# EAGLE board M215X (EAGLE 6.6.0)
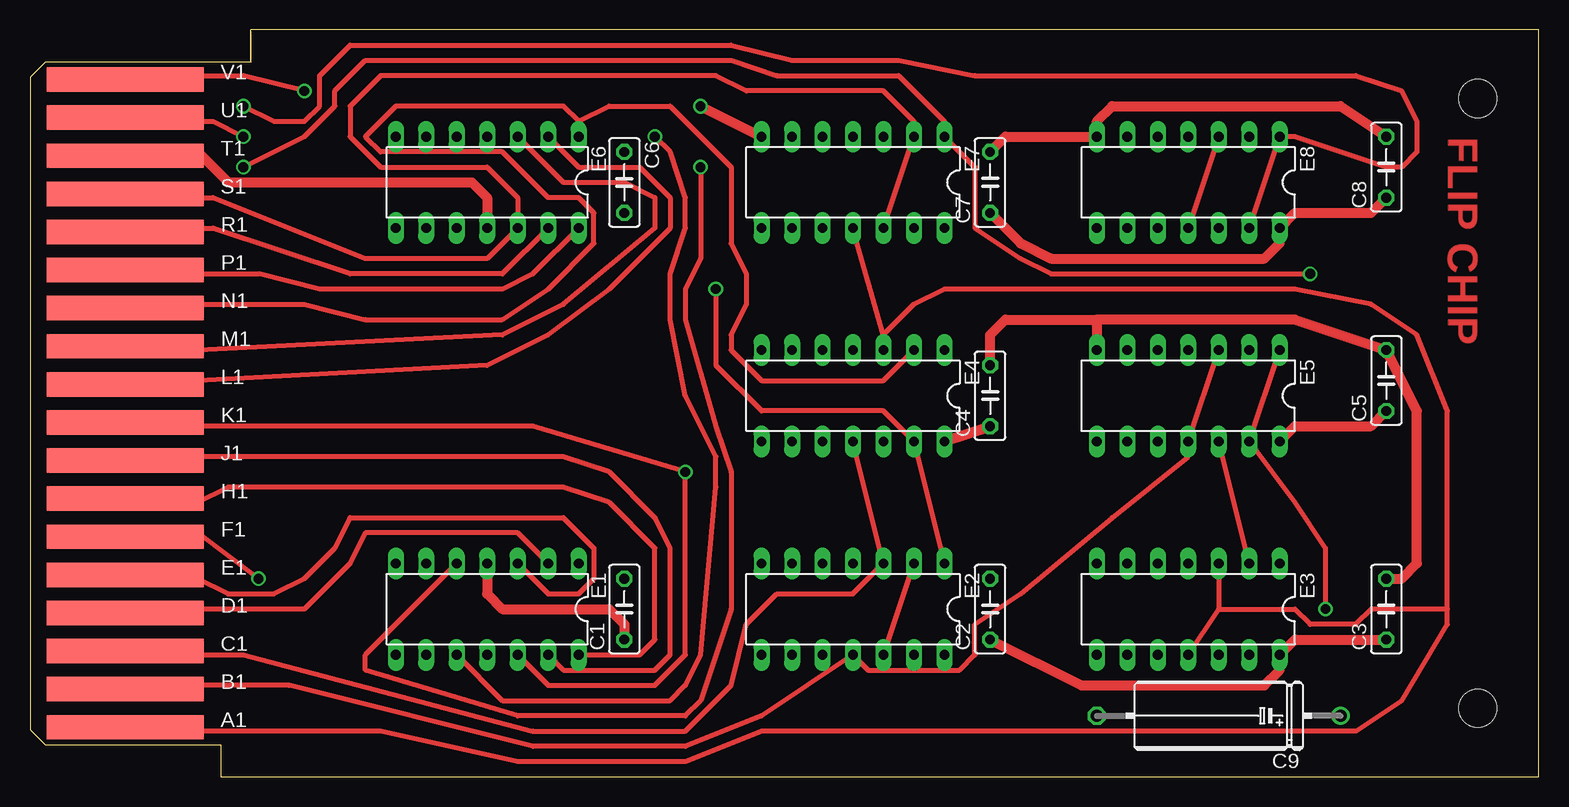
[diagram p0: board, top side]
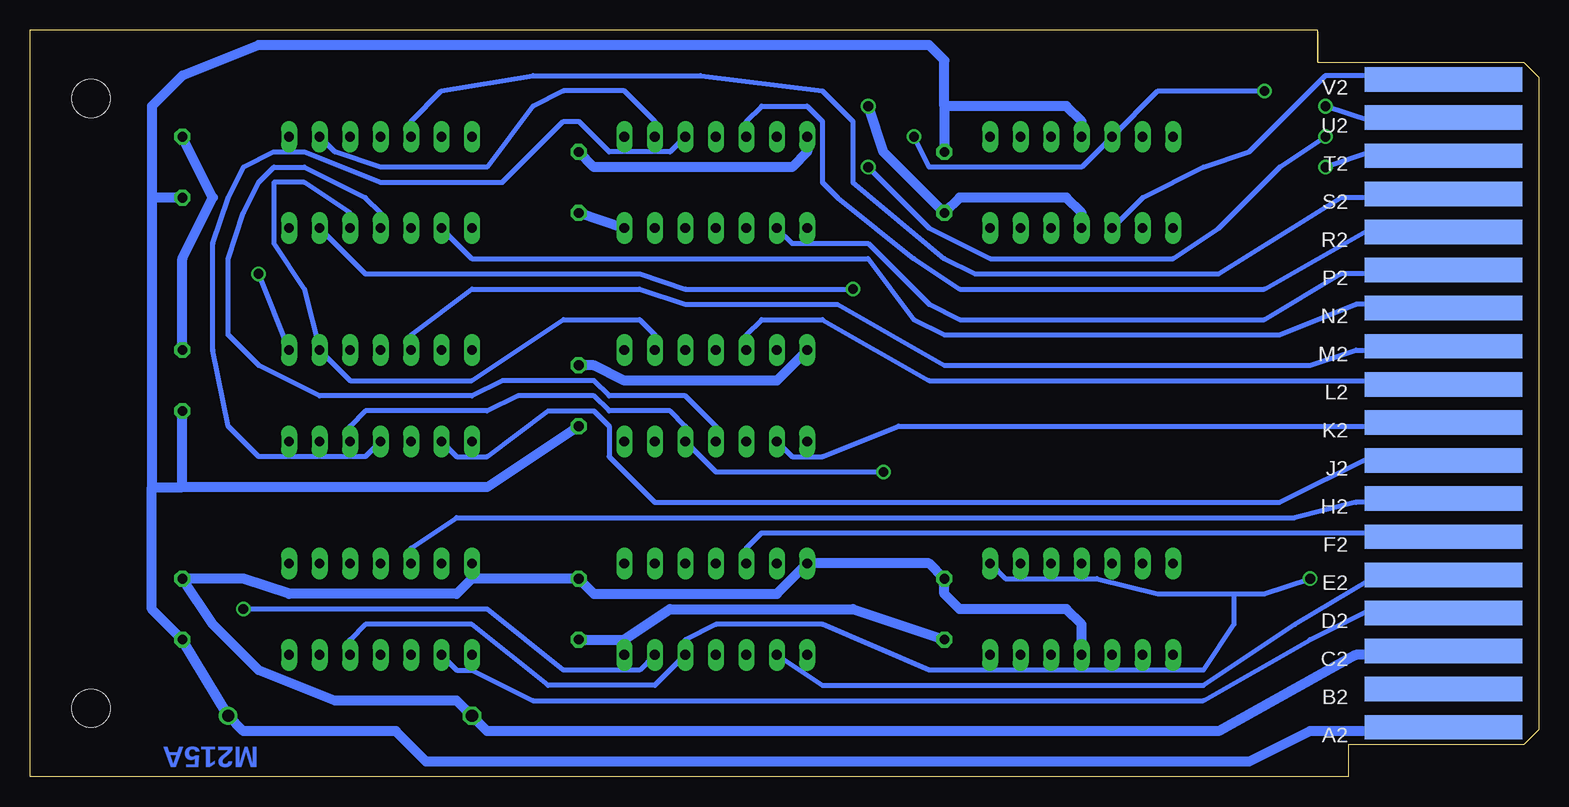
[diagram p1: board, bottom side, seen from below]

Size 125.73 x 62.23 mm. Coordinates in mm from the lower left corner, seen from the top.
Copper layers (1+16): Top 0.035mm / dielectric 1.5mm / Bottom 0.035mm
Design rules "16mils": minimum track width 16mil, minimum drill 32mil, track to track 15mil, track to pad 10mil, pad to pad 10mil, via to via 10mil, smd to smd 10mil, copper to edge 13mil, drill to drill 10mil, minimum pad ring 10mil, minimum via ring 8mil, stop-mask expansion 0mil, vias tented up to drill 0mil, thermal gap 10mil
Net classes: 1 supply: width 0.813 mm

## Footprints (pad centres in the part's own frame; a part is rotated, then mirrored left to right if it is on the bottom)
C050-025X075 = drill 0.813 octagon: 1 -2.54,0; 2 2.54,0
E12-8 = drill 1.016: + -10.16,0 | drill 1.016 octagon: - 10.16,0
DIL14 = drill 0.813 long: 1 -7.62,-3.81; 2 -5.08,-3.81; 3 -2.54,-3.81; 4 0,-3.81; 5 2.54,-3.81; 6 5.08,-3.81; 7 7.62,-3.81; 8 7.62,3.81; 9 5.08,3.81; 10 2.54,3.81; 11 0,3.81; 12 -2.54,3.81; 13 -5.08,3.81; 14 -7.62,3.81
SINGLE = hole 3.175: 120.65,56.515; 120.65,5.715
EDGE-CON2 = smd 13.106 x 2.032: A1 7.938,4.128; B1 7.938,7.303; C1 7.938,10.477; D1 7.938,13.652; E1 7.938,16.828; F1 7.938,20.003; H1 7.938,23.177; J1 7.938,26.352; K1 7.938,29.527; L1 7.938,32.703; M1 7.938,35.877; N1 7.938,39.053; P1 7.938,42.227; R1 7.938,45.403; S1 7.938,48.578; T1 7.938,51.752; U1 7.938,54.928; V1 7.938,58.102 | smd 13.106 x 2.032 bottom: A2 7.938,4.128; B2 7.938,7.303; C2 7.938,10.477; D2 7.938,13.652; E2 7.938,16.828; F2 7.938,20.003; H2 7.938,23.177; J2 7.938,26.352; K2 7.938,29.527; L2 7.938,32.703; M2 7.938,35.877; N2 7.938,39.053; P2 7.938,42.227; R2 7.938,45.403; S2 7.938,48.578; T2 7.938,51.752; U2 7.938,54.928; V2 7.938,58.102

## Placement (x,y rotation side)
C1  .01uF  [C050-025X075]  49.53,13.97 90 top
C2  .01uF  [C050-025X075]  80.01,13.97 90 top
C3  .01uF  [C050-025X075]  113.03,13.97 90 top
C4  .01uF  [C050-025X075]  80.01,31.75 90 top
C5  .01uF  [C050-025X075]  113.03,33.02 90 top
C6  .01uF  [C050-025X075]  49.53,49.53 270 top
C7  .01uF  [C050-025X075]  80.01,49.53 90 top
C8  .01uF  [C050-025X075]  113.03,50.8 90 top
C9  6.8uF  [E12-8]  99.06,5.08 180 top
E1  7482N  [DIL14]  38.1,13.97 180 top
E2  7474N  [DIL14]  68.58,13.97 180 top
E3  7474N  [DIL14]  96.52,13.97 180 top
E4  7474N  [DIL14]  68.58,31.75 180 top
E5  7474N  [DIL14]  96.52,31.75 180 top
E6  7482N  [DIL14]  38.1,49.53 180 top
E7  7474N  [DIL14]  68.58,49.53 180 top
E8  7474N  [DIL14]  96.52,49.53 180 top
U$1  OUTLINE-SINGLE  [SINGLE]  0,0 0 top
U$2  [EDGE-CON2]  0,0 0 top

## Library data of the parts
C1-C8 = rcl
C9 E1 E6 U$1 U$2 = dec-con
E2-E5 E7 E8 = 74xx-us

## Nets
A1: E3.3 E3.11 E4.3 E7.11 U$2.A1
B1: E2.11 E5.3 E5.11 E7.3 U$2.B1
C1: E2.3 E4.11 E8.3 E8.11 U$2.C1
D1: E1.2 U$2.D1
D2: E3.9 U$2.D2
E1: E1.3 U$2.E1
E2: E2.9 U$2.E2
F1: E1.1 E2.2 E2.12 E3.12 U$2.F1
F2: E2.5 U$2.F2
GND [supply]: C1.2 C2.2 C3.2 C4.2 C5.2 C6.2 C7.2 C8.2 C9.- E1.11 E2.7 E3.7 E4.7 E5.7 E6.11 E7.7 E8.7 U$2.C2 U$2.T1
H1: E1.14 U$2.H1
H2: E3.5 U$2.H2
J1: E1.13 U$2.J1
J2: E5.9 U$2.J2
K1: E1.12 E3.2 E4.12 E5.12 U$2.K1
K2: E4.9 U$2.K2
L1: E6.2 U$2.L1
L2: E4.5 U$2.L2
M1: E6.3 U$2.M1
M2: E5.5 U$2.M2
N1: E4.2 E5.2 E6.1 E8.12 U$2.N1
N2: E8.9 U$2.N2
P1: E6.14 U$2.P1
P2: E7.9 U$2.P2
R1: E6.13 U$2.R1
R2: E7.5 U$2.R2
S1: E6.12 E7.2 E7.12 E8.2 U$2.S1
S2: E8.5 U$2.S2
T2: E2.13 E5.1 E5.13 E7.1 U$2.T2
U1: E1.5 U$2.U1
U2: E2.1 E4.13 E8.1 E8.13 U$2.U2
V1: E1.10 E6.5 U$2.V1
V2: E6.10 U$2.V2
VCC [supply]: C1.1 C2.1 C3.1 C4.1 C5.1 C6.1 C7.1 C8.1 C9.+ E1.4 E2.14 E3.14 E4.14 E5.14 E6.4 E7.14 E8.14 U$2.A2

## Tracks (layer width: path | path; a pad name or v marks a point on that pad's centre or on a via)
A1
  Top 0.406: U$2.A1 8.89,3.81 29.21,3.81 40.64,1.27 54.61,1.27 60.96,3.81 110.49,3.81 114.3,6.35 118.11,12.7 118.11,13.97 | 118.11,13.97 111.76,13.97 110.49,12.7 106.68,12.7 105.41,13.97 99.06,13.97 | 118.11,13.97 118.11,30.48 115.57,36.83 111.76,39.37 105.41,40.64 76.2,40.64 73.66,39.37 71.12,36.83 | E4.3 71.12,36.83 | 71.12,36.83 E7.11 | E3.11 99.06,13.97 | E3.3 99.06,13.97
B1
  Top 0.406: U$2.B1 8.89,7.62 21.59,7.62 41.91,2.54 54.61,2.54 60.96,5.08 E2.11 69.85,8.89 77.47,8.89 78.74,10.16 78.74,12.7 82.55,15.24 90.17,21.59 96.52,26.67 E5.11 E5.3
  Bottom 0.406: E5.11 97.79,26.67 106.68,26.67 109.22,29.21 110.49,35.56 110.49,44.45 109.22,48.26 107.95,50.8 105.41,52.07 102.87,52.07 96.52,49.53 86.36,49.53 81.28,54.61 80.01,54.61 77.47,52.07 72.39,52.07 E7.3
C1
  Top 0.406: U$2.C1 8.89,10.16 17.78,10.16 41.91,3.81 54.61,3.81 58.42,7.62 59.69,12.7 62.23,15.24 68.58,15.24 E2.3 E4.11 | E8.3 E8.11
  Bottom 0.406: E4.11 68.58,29.21 71.12,31.75 77.47,31.75 78.74,33.02 86.36,33.02 88.9,31.75 101.6,31.75 106.68,34.29 109.22,36.83 109.22,43.18 107.95,46.99 106.68,49.53 105.41,50.8 102.87,50.8 97.79,48.26 96.52,46.99 E8.11
D1
  Top 0.406: E1.2 40.64,20.32 27.94,20.32 26.67,17.78 22.86,13.97 8.89,13.97 U$2.D1
D2
  Bottom 0.406: E3.9 90.17,8.89 88.9,8.89 83.82,6.35 27.94,6.35 19.05,11.43 13.97,13.97 8.89,13.97 U$2.D2
E1
  Top 0.406: U$2.E1 8.89,16.51 13.97,16.51 16.51,15.24 20.32,15.24 22.86,16.51 25.4,19.05 26.67,21.59 44.45,21.59 46.99,19.05 46.99,16.51 45.72,15.24 43.18,15.24 E1.3
E2
  Bottom 0.406: E2.9 59.69,7.62 27.94,7.62 20.32,12.7 13.97,16.51 8.89,16.51 U$2.E2
F1  (via drill 0.81)
  Top 0.406: v19.05,16.51 13.97,20.32 8.89,20.32 U$2.F1 | E2.2 E2.12
  Bottom 0.406: E1.1 44.45,16.51 36.83,16.51 31.75,15.24 25.4,15.24 | 25.4,15.24 25.4,12.7 27.94,8.89 50.8,8.89 59.69,12.7 68.58,12.7 71.12,11.43 E2.12 73.66,7.62 82.55,7.62 88.9,12.7 97.79,12.7 99.06,11.43 E3.12 | 25.4,15.24 22.86,15.24 v19.05,16.51
F2
  Bottom 0.406: E2.5 66.04,19.05 64.77,20.32 8.89,20.32 U$2.F2
GND  (via drill 0.81)
  Top 0.813: C4.2 80.01,36.83 81.28,38.1 88.9,38.1 | 88.9,38.1 E5.7 | 88.9,38.1 105.41,38.1 C5.2 115.57,30.48 115.57,17.78 114.3,16.51 C3.2 | v55.88,55.88 E7.7 | U$2.T1 8.89,52.07 13.97,52.07 16.51,49.53 36.83,49.53 38.1,48.26 E6.11 | C7.2 81.28,53.34 E8.7 88.9,54.61 90.17,55.88 109.22,55.88 C8.2
  Bottom 0.813: U$2.C2 8.89,10.16 15.24,10.16 26.67,3.81 87.63,3.81 C9.- 90.17,6.35 100.33,6.35 106.68,8.89 110.49,12.7 C3.2 107.95,16.51 104.14,15.24 90.17,15.24 88.9,16.51 | E1.11 38.1,12.7 39.37,13.97 48.26,13.97 49.53,15.24 C1.2 50.8,17.78 E2.7 63.5,15.24 78.74,15.24 C2.2 88.9,16.51 | E3.7 88.9,16.51 | E4.7 63.5,33.02 76.2,33.02 78.74,34.29 C4.2 | C5.2 113.03,43.18 110.49,48.26 C8.2 | E6.11 38.1,46.99 39.37,48.26 48.26,48.26 C6.2 54.61,52.07 v55.88,55.88 | E7.7 60.96,52.07 62.23,50.8 78.74,50.8 C7.2
H1
  Top 0.406: E1.14 50.8,10.16 52.07,11.43 52.07,19.05 48.26,22.86 44.45,24.13 16.51,24.13 13.97,22.86 8.89,22.86 U$2.H1
H2
  Bottom 0.406: E3.5 93.98,19.05 90.17,21.59 20.32,21.59 15.24,22.86 13.97,22.86 12.7,22.86 8.89,22.86 U$2.H2
J1
  Top 0.406: E1.13 44.45,8.89 52.07,8.89 53.34,10.16 53.34,19.05 52.07,21.59 48.26,25.4 44.45,26.67 8.89,26.67 U$2.J1
J2
  Bottom 0.406: E5.9 90.17,26.67 87.63,26.67 82.55,30.48 78.74,30.48 77.47,29.21 77.47,26.67 73.66,22.86 21.59,22.86 13.97,26.67 8.89,26.67 U$2.J2
K1  (via drill 0.81)
  Top 0.406: E1.12 43.18,7.62 52.07,7.62 54.61,10.16 v54.61,25.4 41.91,29.21 8.89,29.21 U$2.K1 | E3.2 E5.12
  Bottom 0.406: v54.61,25.4 68.58,25.4 E4.12 71.12,29.21 72.39,30.48 77.47,30.48 78.74,31.75 85.09,31.75 87.63,30.48 97.79,30.48 99.06,29.21 E5.12
K2
  Bottom 0.406: E4.9 62.23,26.67 59.69,26.67 53.34,29.21 8.89,29.21 U$2.K2
L1
  Top 0.406: U$2.L1 8.89,33.02 13.97,33.02 38.1,34.29 43.18,36.83 48.26,40.64 53.34,45.72 53.34,48.26 50.8,50.8 45.72,50.8 E6.2
L2
  Bottom 0.406: E4.5 66.04,36.83 64.77,38.1 59.69,38.1 50.8,33.02 8.89,33.02 U$2.L2
M1
  Top 0.406: U$2.M1 8.89,35.56 13.97,35.56 39.37,36.83 44.45,39.37 52.07,45.72 52.07,48.26 49.53,49.53 44.45,49.53 E6.3
M2
  Bottom 0.406: E5.5 93.98,36.83 88.9,40.64 74.93,40.64 71.12,39.37 58.42,39.37 49.53,34.29 19.05,34.29 15.24,35.56 13.97,35.56 12.7,35.56 8.89,35.56 U$2.M2
N1
  Top 0.406: U$2.N1 8.89,39.37 22.86,39.37 27.94,38.1 39.37,38.1 43.18,40.64 46.99,44.45 46.99,46.99 45.72,48.26 43.18,48.26 39.37,52.07 29.21,52.07 27.94,53.34 30.48,55.88 44.45,55.88 45.72,54.61 | E6.1 45.72,54.61 | 45.72,54.61 48.26,55.88 53.34,55.88 58.42,50.8 58.42,44.45 59.69,41.91 59.69,39.37 58.42,36.83 58.42,35.56 60.96,33.02 71.12,33.02 E4.2
  Bottom 0.406: E8.12 99.06,46.99 102.87,49.53 105.41,49.53 105.41,44.45 102.87,40.64 E5.2 99.06,33.02 88.9,33.02 81.28,38.1 74.93,38.1 73.66,36.83 E4.2
N2
  Bottom 0.406: E8.9 88.9,43.18 55.88,43.18 52.07,38.1 49.53,36.83 21.59,36.83 15.24,39.37 8.89,39.37 U$2.N2
P1
  Top 0.406: E6.14 41.91,41.91 39.37,40.64 24.13,40.64 19.05,41.91 8.89,41.91 U$2.P1
P2
  Bottom 0.406: E7.9 62.23,44.45 55.88,44.45 50.8,39.37 48.26,38.1 22.86,38.1 16.51,41.91 8.89,41.91 U$2.P2
R1
  Top 0.406: E6.13 39.37,41.91 26.67,41.91 15.24,45.72 8.89,45.72 U$2.R1
R2
  Bottom 0.406: E7.5 66.04,54.61 64.77,55.88 60.96,55.88 59.69,54.61 59.69,49.53 58.42,48.26 52.07,43.18 48.26,40.64 22.86,40.64 13.97,45.72 8.89,45.72 U$2.R2
S1
  Top 0.406: U$2.S1 8.89,48.26 15.24,48.26 27.94,43.18 38.1,43.18 E6.12 40.64,48.26 38.1,50.8 29.21,50.8 26.67,53.34 26.67,55.88 29.21,58.42 57.15,58.42 59.69,57.15 71.12,57.15 73.66,54.61 E7.2 E7.12
  Bottom 0.406: E7.2 73.66,54.61 76.2,57.15 81.28,57.15 83.82,55.88 87.63,50.8 96.52,50.8 100.33,52.07 E8.2
S2
  Bottom 0.406: E8.5 93.98,54.61 91.44,57.15 83.82,58.42 69.85,58.42 59.69,57.15 57.15,54.61 57.15,49.53 49.53,43.18 46.99,41.91 26.67,41.91 16.51,48.26 8.89,48.26 U$2.S2
T2  (via drill 0.81)
  Top 0.406: v17.78,50.8 22.86,53.34 25.4,55.88 25.4,57.15 27.94,59.69 58.42,59.69 62.23,58.42 72.39,58.42 76.2,54.61 E7.1 78.74,50.8 78.74,45.72 82.55,43.18 85.09,41.91 v106.68,41.91 | v107.95,13.97 107.95,19.05 105.41,22.86 E5.13 E5.1
  Bottom 0.406: U$2.T2 10.16,52.07 13.97,52.07 v17.78,50.8 | E5.1 v106.68,41.91 | E2.13 74.93,8.89 81.28,8.89 87.63,13.97 v107.95,13.97
U1  (via drill 0.81)
  Top 0.406: v17.78,53.34 15.24,54.61 8.89,54.61 U$2.U1 | v55.88,50.8 55.88,43.18 54.61,40.64 54.61,38.1 57.15,29.21 58.42,25.4 58.42,13.97 55.88,6.35 54.61,5.08 40.64,5.08 27.94,8.89 27.94,10.16 E1.5
  Bottom 0.406: v55.88,50.8 50.8,45.72 45.72,43.18 30.48,43.18 26.67,45.72 21.59,50.8 v17.78,53.34
U2  (via drill 0.81)
  Top 0.406: v17.78,55.88 20.32,54.61 22.86,54.61 24.13,55.88 24.13,58.42 26.67,60.96 58.42,60.96 63.5,59.69 72.39,59.69 78.74,58.42 110.49,58.42 114.3,57.15 115.57,54.61 115.57,52.07 114.3,50.8 113.03,50.8 105.41,53.34 E8.1 E8.13 | v57.15,40.64 57.15,34.29 60.96,30.48 71.12,30.48 E4.13 E2.1
  Bottom 0.406: U$2.U2 8.89,54.61 13.97,54.61 v17.78,55.88 | E8.13 97.79,41.91 74.93,41.91 71.12,40.64 v57.15,40.64
V1  (via drill 0.81)
  Top 0.406: E1.10 39.37,6.35 53.34,6.35 54.61,7.62 55.88,10.16 57.15,24.13 57.15,26.67 54.61,31.75 53.34,38.1 53.34,41.91 54.61,45.72 54.61,48.26 53.34,52.07 v52.07,53.34 | v22.86,57.15 17.78,58.42 8.89,58.42 U$2.V1
  Bottom 0.406: v52.07,53.34 50.8,50.8 38.1,50.8 E6.5 31.75,57.15 v22.86,57.15
V2
  Bottom 0.406: E6.10 33.02,48.26 27.94,50.8 24.13,52.07 17.78,58.42 8.89,58.42 U$2.V2
VCC
  Top 0.813: C3.1 105.41,11.43 E3.14 104.14,8.89 102.87,7.62 87.63,7.62 C2.1 | E5.14 105.41,29.21 111.76,29.21 C5.1 | C8.1 111.76,46.99 105.41,46.99 E8.14 104.14,44.45 102.87,43.18 85.09,43.18 82.55,44.45 C7.1 | E4.14 C4.1 | E1.4 38.1,15.24 39.37,13.97 48.26,13.97 49.53,12.7 C1.1
  Bottom 0.813: U$2.A2 8.89,4.13 8.89,3.81 19.05,3.81 24.13,1.27 92.71,1.27 95.25,3.81 107.95,3.81 C9.+ C3.1 115.57,13.97 115.57,24.13 | C2.1 76.2,11.43 | 76.2,11.43 E2.14 | 76.2,11.43 72.39,13.97 57.15,13.97 C1.1 | C4.1 87.63,24.13 113.03,24.13 | 113.03,24.13 C5.1 | 115.57,24.13 113.03,24.13 | E6.4 38.1,54.61 39.37,55.88 49.53,55.88 | 49.53,55.88 C6.1 | 49.53,55.88 49.53,59.69 50.8,60.96 106.68,60.96 113.03,58.42 115.57,55.88 115.57,48.26 | 115.57,48.26 115.57,24.13 | C8.1 115.57,48.26 | E7.14 C7.1

## Text on the board
Top: FLIP CHIP
Bottom: M215A